# Altium PCB Spot Welder Layout.PcbDoc (part 2 of 2)
Units mm, origin at the board's own origin, x right, y up, seen from the top; angles counter-clockwise.
Board outline 154.58 x 106.48 mm, 2 copper layers (Top Layer, Bottom Layer); 118 components, 61 nets, 368 pads, 104 vias.
Unrouted connection lines stored in the file: 1.
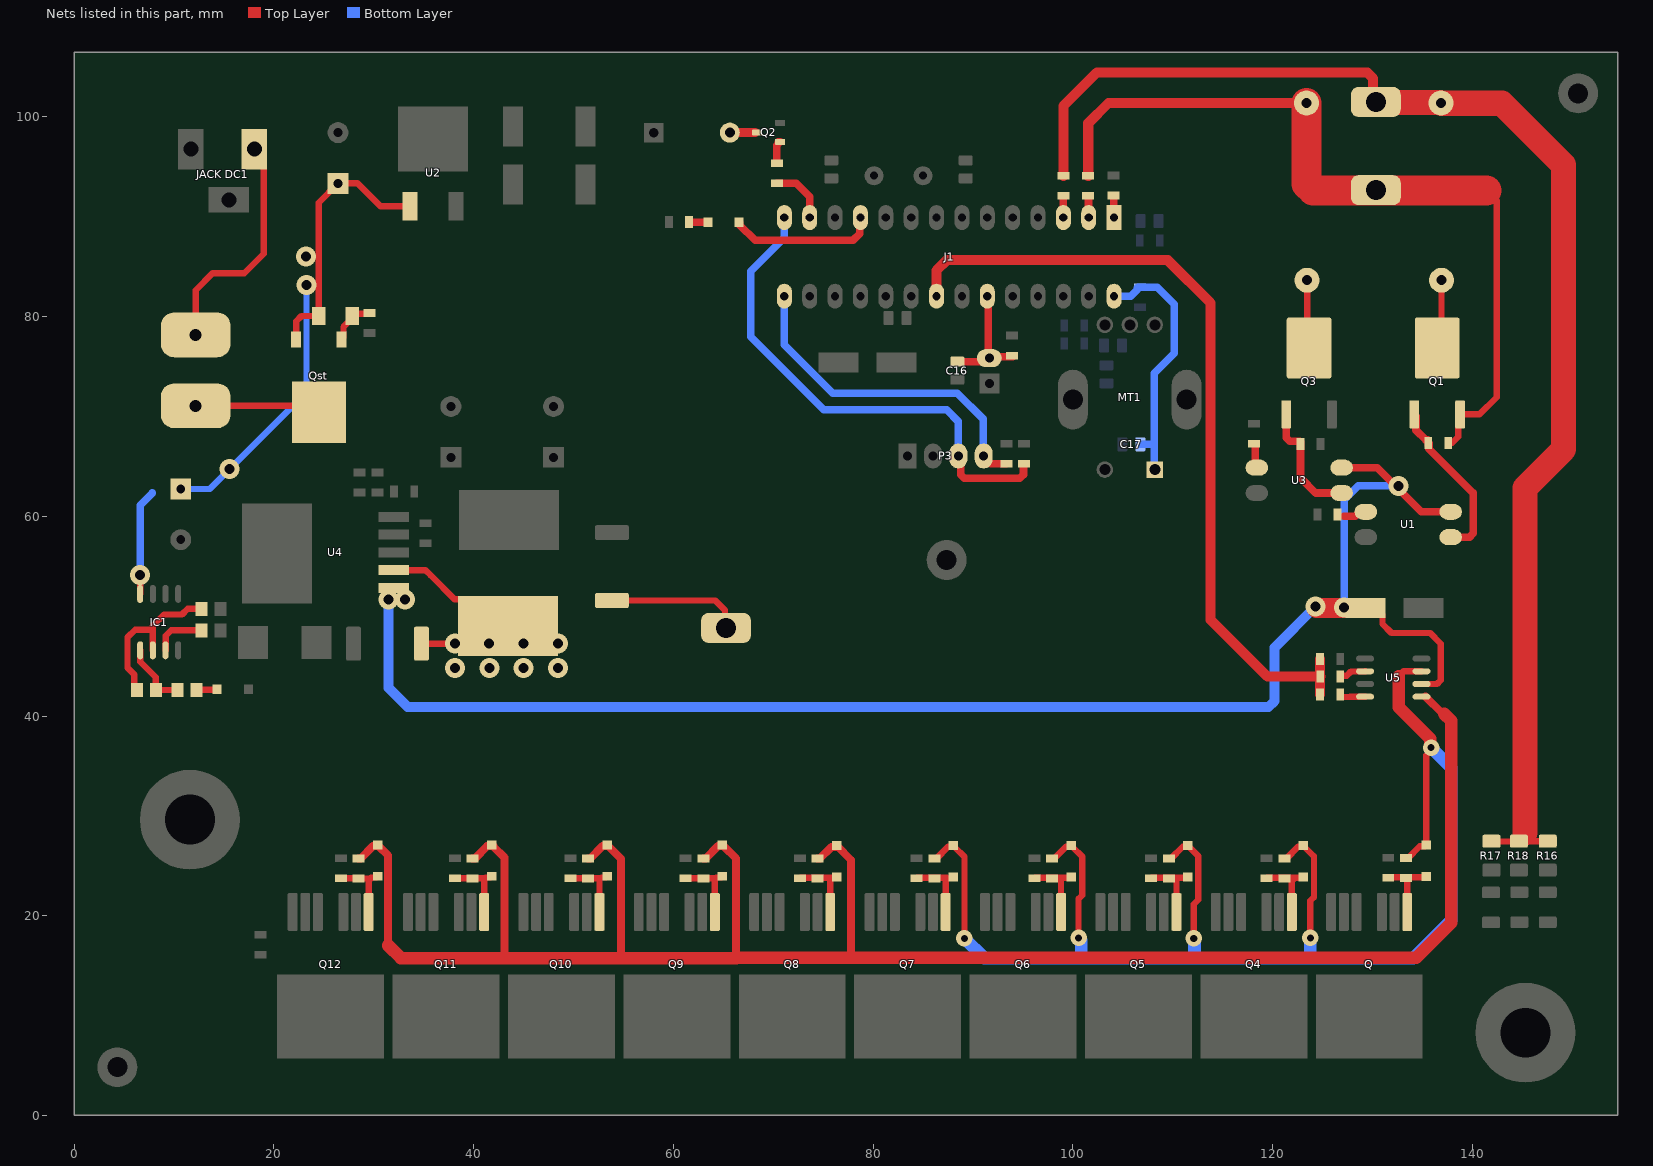
[diagram p2: the nets of this part, all layers, seen from the top]

## Via types
v1: diameter 2, hole 1, Top Layer to Bottom Layer, 76 vias
v2: diameter 3, hole 2, Top Layer to Bottom Layer, 23 vias
v3: diameter 1.651, hole 0.711, Top Layer to Bottom Layer, 5 vias

## Nets (pads, with @x,y where several pads share a name; then routed paths per layer and width w, separated by ;. In a path a pad name is that pad's centre, name@x,y a point inside that pad or via, vN(x,y) a via of type N, cw(c..) or ccw(c..) an arc to the next point about the centre after c; other vN are vias at no path point) (continued)
NetC16_1: C16.1 J1.23 P1.2 R9.1 | length 11.8
  Top Layer w0.762: C16.1@88.443,75.489 90.622,75.489 90.978,75.844 P1.2@91.643,75.844 91.542,75.946 91.542,81.94 J1.23@91.44,82.042 ; P1.2@91.834,75.984 93.612,75.984 R9.1@93.967,75.984
NetD3_K: D3.K L1.1 U4.2 | length 29.1
  Top Layer w0.635: U4.2@32.004,54.61 35.179,54.61 35.687,54.102 38.085,51.705 40.751,51.705 L1.1@43.434,49.022 ; D3.K@34.769,47.244 v1(38.117,47.244) ; L1.1@41.487,47.244 v1(38.117,47.244) ; v1(41.554,47.244) L1.1@41.656,47.244 ; v1(38.117,47.244) L1.1@41.656,47.244 ; L1.1@41.656,47.244 L1.1@43.434,49.022 ; L1.1@41.656,47.244 L1.1@43.434,49.022
  other v1: 38.134,44.806 41.571,44.806 45.009,44.806 48.446,44.806 44.992,47.244 48.429,47.244
NetD4_1: D4.1 J1.11 | length 14.9
  Top Layer w0.762: D4.1@66.599,89.459 66.668,89.39 66.668,89.152 68.19,87.63 77.994,87.63 78.684,88.319 78.684,89.86 J1.11@78.74,89.916
NetD4_2: D4.2 RON1.2 | length 1.9
  Top Layer w0.762: RON1.2@61.57,89.459 D4.2@63.449,89.459
NetD5_1: D5.1 Q.1 R25.2 R26.1 | length 7.5
  Top Layer w0.635: R26.1@131.597,23.8 131.661,23.863 R25.2@133.807,23.863 ; Q.1@133.502,20.37 133.502,23.558 R25.2@133.807,23.863 ; D5.1@135.407,23.927 135.344,23.863 R25.2@133.807,23.863
NetD5_2: D5.2 D7.2 D8.2 D9.2 D10.2 R25.1 R30.1 R33.1 R35.1 R38.1 U5.7 | length 148.3
  Top Layer w0.635: R38.1@86.131,25.73 86.35,25.73 87.514,26.893 87.904,26.893 D10.2@88.036,27.026 88.061,27.026 88.194,26.893 88.194,26.868 89.154,25.908 v3(89.154,17.729) ; R35.1@97.942,25.73 98.161,25.73 99.325,26.893 99.715,26.893 D9.2@99.847,27.026 99.872,27.026 100.005,26.893 100.005,26.868 100.94,25.934 100.94,22.047 100.584,21.692 v3(100.584,17.78) ; R33.1@109.626,25.73 109.845,25.73 111.009,26.893 111.399,26.893 D8.2@111.531,27.026 111.556,27.026 111.689,26.893 111.689,26.868 112.573,25.985 112.573,21.59 112.116,21.133 v3(112.116,17.729) ; R30.1@121.183,25.73 121.402,25.73 122.566,26.893 122.956,26.893 D7.2@123.088,27.026 123.113,27.026 123.246,26.893 123.246,26.868 124.155,25.959 124.155,21.844 123.8,21.488 v3(123.8,17.78) ; 132.639,43.993 133.121,44.475 U5.7@134.93,44.475 ; R25.1@133.375,25.781 133.594,25.781 134.758,26.944 135.275,26.944 D5.2@135.407,27.077 135.407,36.072 135.89,36.555 v3(135.89,36.83)
  Top Layer w1.27: 132.639,43.993 132.639,40.894 135.817,37.716 135.817,36.903 v3(135.89,36.83)
  Bottom Layer w1.27: v3(89.154,17.729) 91.135,15.748 100.838,15.748 ; v3(100.584,17.78) 100.838,17.526 100.838,15.748 ; v3(112.116,17.729) 112.188,17.656 112.188,16.082 112.522,15.748 ; v3(123.8,17.78) 123.8,15.748 ; v3(135.89,36.83) 137.922,34.798 137.922,19.558 134.112,15.748 123.8,15.748 ; 100.838,15.748 112.522,15.748 ; 112.522,15.748 123.8,15.748
NetD6_1: D6.1 R24.2 | length 2.1
  Top Layer w0.635: R24.2@12.257,42.611 12.288,42.642 14.27,42.642 D6.1@14.3,42.672
NetD7_1: D7.1 Q4.1 R27.1 R30.2 | length 7.3
  Top Layer w0.635: R27.1@119.405,23.749 119.469,23.812 122.276,23.812 ; Q4.1@121.945,20.37 121.945,23.482 122.276,23.812 ; D7.1@123.088,23.876 123.025,23.812 122.276,23.812
NetD8_1: D8.1 Q5.1 R22.1 R33.2 | length 7.2
  Top Layer w0.635: R22.1@107.848,23.749 107.912,23.812 110.388,23.812 ; Q5.1@110.388,20.37 110.388,23.812 ; D8.1@111.531,23.876 111.468,23.812 110.388,23.812
NetD9_1: D9.1 Q6.1 R23.1 R35.2 | length 7.2
  Top Layer w0.635: R23.1@96.164,23.749 96.228,23.812 98.908,23.812 ; Q6.1@98.831,20.37 98.831,23.736 98.908,23.812 ; D9.1@99.847,23.876 99.784,23.812 98.908,23.812
NetD10_1: D10.1 Q7.1 R28.1 R38.2 | length 6.5
  Top Layer w0.635: R28.1@84.353,23.749 84.417,23.812 87.376,23.812 87.274,23.711 Q7.1@87.274,20.37
NetD11_1: D11.1 Q8.1 R41.2 R42.1 | length 7.3
  Top Layer w0.635: R42.1@72.669,23.749 72.733,23.812 75.54,23.812 ; Q8.1@75.717,20.37 75.717,23.635 75.54,23.812 ; D11.1@76.352,23.876 76.289,23.812 75.54,23.812
NetD11_2: D11.2 D12.2 D13.2 D14.2 D15.2 R41.1 R45.1 R46.1 R47.1 R48.1 U5.5 | length 202.7
  Top Layer w0.8: R48.1@28.473,25.73 28.692,25.73 29.932,26.969 30.246,26.969 D15.2@30.378,27.102 30.403,27.102 30.536,26.969 30.536,26.944 31.445,26.035 31.445,17.018 ; R47.1@39.903,25.73 40.122,25.73 41.362,26.969 41.676,26.969 D14.2@41.808,27.102 41.833,27.102 41.966,26.969 41.966,26.944 43.078,25.832 43.078,15.748 ; R46.1@51.46,25.73 51.679,25.73 52.919,26.969 53.233,26.969 D13.2@53.365,27.102 53.39,27.102 53.523,26.969 53.523,26.944 54.762,25.705 54.762,15.748 ; R45.1@63.017,25.73 63.236,25.73 64.476,26.969 64.79,26.969 D12.2@64.922,27.102 64.947,27.102 65.08,26.969 65.08,26.944 66.294,25.73 66.294,15.799 66.294,15.748 ; R41.1@74.447,25.73 74.666,25.73 75.83,26.893 76.22,26.893 D11.2@76.352,27.026 76.377,27.026 76.51,26.893 76.51,26.868 77.775,25.604 77.775,15.799 ; U5.5@135.33,41.935 137.046,40.22 137.211,40.22
  Top Layer w1.27: 31.445,17.018 32.715,15.748 43.078,15.748 54.762,15.748 66.294,15.748 ; 66.294,15.799 77.775,15.799 134.417,15.799 137.922,19.304 137.922,39.509 137.211,40.22
NetD12_1: D12.1 Q9.1 R43.1 R45.2 | length 7.2
  Top Layer w0.635: R43.1@61.239,23.749 64.211,23.749 ; Q9.1@64.16,20.37 64.16,23.698 64.211,23.749 ; D12.1@64.922,23.952 64.79,23.819 64.282,23.819 64.211,23.749
NetD13_1: D13.1 Q10.1 R39.1 R46.2 | length 7.2
  Top Layer w0.635: R39.1@49.682,23.749 52.73,23.749 ; Q10.1@52.603,20.37 52.603,23.622 52.73,23.749 ; D13.1@53.365,23.952 53.233,23.819 52.801,23.819 52.73,23.749
NetD14_1: D14.1 Q11.1 R40.1 R47.2 | length 7.2
  Top Layer w0.635: R40.1@38.125,23.749 41.148,23.749 ; Q11.1@41.046,20.37 41.046,23.647 41.148,23.749 ; D14.1@41.808,23.952 41.676,23.819 41.218,23.819 41.148,23.749
NetD15_1: D15.1 Q12.1 R44.1 R48.2 | length 7.2
  Top Layer w0.635: R44.1@26.695,23.749 26.708,23.736 28.461,23.736 R48.2@28.473,23.724 29.667,23.724 ; Q12.1@29.489,20.37 29.489,23.546 29.667,23.724 ; D15.1@30.378,23.952 30.246,23.819 29.763,23.819 29.667,23.724
NetDST_1: DST.1 Qst.1 RST.1 | length 4.8
  Top Layer w0.635: Qst.1@26.785,77.724 26.968,77.907 26.968,78.966 27.837,79.836 DST.1@27.837,80.061 28.078,80.302 29.502,80.302 RST.1@29.566,80.366 RST.1@29.785,80.366
NetIC1_1: IC1.1 R24.1 R31.2 | length 6.8
  Top Layer w0.635: IC1.1@6.604,46.578 6.622,46.56 6.622,45.448 8.178,43.892 8.178,42.626 R31.2@8.193,42.611 R24.1@10.357,42.611
NetIC1_2: IC1.2 R29.2 R31.1 | length 16.6
  Top Layer w0.635: R31.1@6.293,42.611 6.011,42.894 6.011,44.154 5.334,44.831 5.334,47.879 6.096,48.641 7.874,48.641 ; IC1.2@7.874,46.578 7.874,48.641 ; R29.2@12.762,50.734 11.364,50.734 10.795,50.165 9.017,50.165 7.874,49.022 7.874,48.641
NetIC1_3: IC1.3 R21.2 | length 5.3
  Top Layer w0.635: IC1.3@9.144,46.578 9.162,46.595 9.162,48.024 9.713,48.575 R21.2@12.762,48.575
NetJ1_1: J1.1 R11.1 | length 2.2
  Top Layer w0.635: R11.1@104.089,92.126 R11.1@104.115,92.1 ; J1.1@104.115,89.941 J1.1@104.14,89.916
  Top Layer w0.762: J1.1@104.115,89.941 R11.1@104.115,92.1
NetJ1_2: J1.2 R14.2 | length 2.2
  Top Layer w0.635: R14.2@101.549,92.1 R14.2@101.575,92.075 ; J1.2@101.575,89.941 J1.2@101.6,89.916
  Top Layer w0.762: J1.2@101.575,89.941 R14.2@101.575,92.075
NetJ1_3: J1.3 R15.2 | length 2.2
  Top Layer w0.762: J1.3@99.06,89.916 R15.2@99.06,92.075
"NetJACK DC1_1": "JACK DC1.1" SWst.2 | length 23.7
  Top Layer w0.635: SWst.2@12.167,78.169 12.167,82.652 13.843,84.328 17.018,84.328 18.986,86.296 18.986,95.822 18.034,96.774
NetLS1_2: LS1.2 Q2.3 | length 2.7
  Top Layer w0.635: Q2.3@68.205,98.425 68.23,98.45 Q2.3@68.395,98.45
  Top Layer w0.889: LS1.2@65.659,98.425 Q2.3@68.205,98.425
NetQ1_1: Q1.1 R3.2 U1.3 | length 17.1
  Top Layer w0.762: Q1.1@134.21,70.206 134.377,70.038 134.377,68.62 135.353,67.643 135.547,67.643 135.611,67.58 R3.2@135.611,67.142 ; R3.2@135.611,67.361 135.674,67.297 135.674,66.764 140.106,62.332 140.106,58.284 139.734,57.912 U1.3@137.854,57.912
NetQ1_4: Q1.4 R1.1 | length 7
  Top Layer w0.635: Q1.4@136.5,76.856 136.931,77.288 R1.1@136.931,83.642
NetQ2_1: Q2.1 R4.2 | length 2.4
  Top Layer w0.762: R4.2@70.358,95.377 70.358,97.163 70.513,97.318 70.513,97.483 70.53,97.5 Q2.1@70.695,97.5
NetQ3_1: Q3.1 R8.2 U3.3 | length 12.3
  Top Layer w0.762: Q3.1@121.383,70.206 121.383,67.888 121.755,67.516 122.745,67.516 122.809,67.453 R8.2@122.809,67.234 122.809,63.881 124.358,62.332 U3.3@126.932,62.332
NetQ3_4: Q3.4 R5.1 | length 6.9
  Top Layer w0.635: R5.1@123.469,83.642 123.469,77.059 Q3.4@123.673,76.856
NetQst_3: Qst.3 SWst.1 | length 12.6
  Top Layer w0.635: SWst.1@12.167,71.069 23.86,71.069 Qst.3@24.505,70.424
NetR2_1: R2.1 U1.1 | length 2.4
  Top Layer w0.762: 127.152,59.995 128.311,59.995 128.768,60.452 U1.1@129.354,60.452
NetR6_1: R6.1 U3.1 | length 2.5
  Top Layer w0.762: R6.1@118.161,67.259 118.233,67.259 118.296,67.196 118.296,65.007 U3.1@118.432,64.872
NetR32_2: R32.2 U5.2 | length 2.7
  Top Layer w0.635: R32.2@126.797,43.942 126.797,43.98 126.86,44.044 127.457,44.044 127.871,44.458 129.263,44.458 U5.2@129.28,44.475
NetR34_2: R34.2 U5.4 | length 2.7
  Top Layer w0.635: R34.2@126.771,42.164 126.771,41.974 126.835,41.91 127.762,41.91 127.77,41.918 129.263,41.918 U5.4@129.28,41.935
Pulse: J1.21 R32.1 R34.1 R36.2 | length 80.9
  Top Layer w1: J1.21@86.36,82.042 86.36,84.633 87.376,85.649 109.525,85.649 113.792,81.382 113.792,49.632 119.482,43.942 R32.1@124.79,43.942 ; R34.1@124.765,42.164 124.765,43.586 124.765,43.942 R36.2@124.765,45.72
SCL: J1.14 P3.3 Rscl.2 | length 50.8
  Top Layer w0.762: P3.3@88.544,66.04 88.767,65.817 88.767,64.177 89.139,63.805 94.691,63.805 95.063,64.177 95.063,65.218 Rscl.2@95.123,65.278
  Bottom Layer w0.762: J1.14@71.12,89.916 71.12,87.884 67.767,84.531 67.767,77.978 75.082,70.663 87.376,70.663 88.544,69.494 P3.3@88.544,66.04
SDA: J1.15 P3.4 Rsda.1 | length 34.2
  Top Layer w0.635: P3.4@91.084,66.04 91.084,66.005 P3.4@91.812,65.278
  Top Layer w0.762: P3.4@91.812,65.278 Rsda.1@93.345,65.278
  Bottom Layer w0.762: J1.15@71.12,82.042 71.12,77.165 75.946,72.339 88.443,72.339 91.038,69.744 P3.4@91.038,66.04
SPK: J1.13 R4.1 | length 6
  Top Layer w0.762: R4.1@70.358,93.37 72.288,93.37 73.66,91.999 J1.13@73.66,89.916
SW: C17.2 J1.28 MT1.1 RMT13.2 | length 26.1
  Bottom Layer w0.762: J1.28@104.14,82.042 105.816,82.042 106.448,82.674 106.448,82.893 106.512,82.956 RMT13.2@106.731,82.956 108.458,82.956 110.185,81.229 110.185,76.352 108.153,74.32 108.153,67.31 ; C17.2@106.767,67.208 108.052,67.208 108.153,67.31 ; MT1.1@108.215,64.679 108.153,64.74 108.153,67.31
VC0: pad.2@130.353,92.659 Q1.3 R3.1 R5.2 R14.1 | length 83.5
  Top Layer w0.635: R3.1@137.617,67.361 138.024,67.361 138.622,67.959 138.622,70.038 Q1.3@138.79,70.206 140.742,70.206 142.469,71.933 142.469,91.618 141.453,92.634
  Top Layer w1.016: R14.1@101.549,94.107 101.549,99.365 103.581,101.397 R5.2@123.419,101.397
  Top Layer w3: R5.2@123.419,101.397 123.419,93.269 124.054,92.634 141.453,92.634
VC1: D2.K pad.2@65.278,48.819 pad.2@130.353,101.498 R1.2 R15.1 R16.1 R17.1 R18.1 | length 157.3
  Top Layer w0.635: D2.K@53.848,51.566 64.208,51.566 65.176,50.597 pad.2@65.176,49.378 ; R17.1@141.935,27.46 141.963,27.432 144.651,27.432 R18.1@144.678,27.46 R16.1@147.574,27.46
  Top Layer w1.016: R15.1@99.06,94.107 99.06,101.092 102.413,104.445 129.489,104.445 130.084,103.85 130.084,101.767 pad.2@130.353,101.498 ; pad.2@129.02,102.472 pad.2@130.095,101.397 ; pad.2@131.775,101.397 R1.2@136.881,101.397
  Top Layer w2: pad.2@130.353,101.498 pad.2@130.404,101.448 ; R1.2@136.83,101.448 R1.2@136.925,101.353
  Top Layer w2.54: pad.2@130.404,101.448 R1.2@136.83,101.448 ; R1.2@136.925,101.353 142.995,101.353 149.149,95.199 149.149,66.7 145.288,62.84 145.288,28.296
VCC: C3.1 C4.1 C14.1 DST.2 IC1.8 Qst.2 U1.4 U2.1 U3.4 U4.1 U5.6 | length 226.4
  Top Layer w0.635: IC1.8@6.604,52.228 v1(6.604,54.102) ; Qst.2@22.225,77.724 22.225,79.527 22.758,80.061 DST.2@24.487,80.061 24.487,91.416 C4.1@26.416,93.345 28.372,93.345 30.677,91.04 U2.1@33.651,91.04 ; U4.1@32.004,52.832 32.964,52.832 33.147,52.649 v1(33.147,51.689) ; C14.1@129.332,50.825 130.332,50.825 131.015,50.143 131.015,49.223 131.928,48.311 135.788,48.311 136.855,47.244 136.855,43.577 136.483,43.205 U5.6@134.93,43.205
  Top Layer w0.7: v1(124.308,50.952) v1@124.435,50.825
  Top Layer w0.762: U3.4@126.932,64.872 130.505,64.872 134.925,60.452 U1.4@137.854,60.452
  Top Layer w2: v1@124.435,50.825 C14.1@129.332,50.825
  Bottom Layer w0.635: C3.1@10.668,62.738 13.567,62.738 v1(15.566,64.737) 23.266,72.438 v1(23.266,83.16)
  Bottom Layer w0.762: v1(6.604,54.102) 6.604,61.112 7.823,62.332 ; v1(127.181,50.87) 127.181,61.649 128.575,63.043 v1(132.639,63.043)
  Bottom Layer w1: v1(31.496,51.689) 31.496,42.799 33.401,40.894 119.607,40.894 120.193,41.48 120.193,46.838 v1(124.308,50.952)
  other v1: 23.216,86.004
pads on no net: C6.0 C7.0 C8.0 C11.0 C12.0 C13.0 C15.0 C16.0 C17.0 C18.0 C19.0 IC1.5 IC1.6 IC1.7 J1.4 J1.5 J1.6 J1.7 J1.12 J1.16 J1.17 J1.18 Q2.0 R16.0 R17.0 R18.0 U5.1 U5.8

## Other copper
Top Layer:
  rectangle net LOAD-: 20.371,1.575 149.962,14.173
  region net NetD11_2: 134.112,42.418 135.89,42.418 138.43,39.878 137.668,39.116 137.414,39.116 134.874,41.656 134.112,41.656 cw(c134.239,42.037)
  region net +5: 82.55,70.155 82.55,64.973 83.769,64.973 84.379,65.583 84.379,69.088
  region net NetD11_2: 31.14,19.304 31.039,18.999 30.785,16.815 31.242,16.358 31.394,16.51 31.801,16.51
  region net VC1: 141.021,27.28 141.021,30.175 144.475,33.63 146.304,33.63 148.488,31.445 148.488,27.026 148.387,26.924 148.336,26.975 141.173,26.975
  region net NetD5_2: 132.029,44.145 132.08,44.196 132.08,44.552 132.334,44.806 135.484,44.806 135.636,44.653 135.534,44.552 135.534,44.247 133.807,44.247 133.045,43.485 132.994,43.485
  region net GND: 129.54,58.166 133.35,58.166 137.16,54.356 137.16,51.054 133.858,51.054 132.334,52.578 132.334,52.832 130.81,52.832 130.048,53.594
  region net GND: 117.348,62.738 117.094,62.484 117.094,54.102 118.618,52.578 129.032,52.578 130.302,53.848 130.302,58.166 130.048,58.166 129.54,58.674 128.778,57.912 121.666,57.912 119.38,60.198 119.38,62.484 119.126,62.738
  region net LOAD-: 134.937,13.626 140.939,19.629 140.939,19.731 141.122,19.914 141.173,19.863 148.844,19.863 150.774,17.932 150.774,2.286 150.063,1.575 146.558,1.575
  region net BATT-: 21.895,17.729 8.738,17.729 6.35,20.117 6.35,36.271 8.687,38.608 22.504,38.608
  region net LOAD-: 20.396,1.6 18.034,3.962 18.034,16.256 19.253,16.256 21.569,13.94
  region net VC1: 52.375,52.273 52.426,52.222 66.396,52.222 67.767,50.851 67.767,47.549 67.31,47.092 54.102,47.092 52.426,48.768
  region net NetQ3_4: 121.463,85.446 121.463,85.954 122.123,86.614 125.222,86.614 125.882,85.954 125.882,85.446
  region net NetQ1_4: 138.735,79.451 138.735,84.734 137.617,85.852 135.331,85.852 134.264,84.785 134.264,79.299
  region net NetQ3_4: 121.463,79.553 121.463,85.446 125.882,85.446 125.882,79.604
  region net VC0: 137.516,66.853 143.459,66.853 145.745,69.139 145.745,94.945 143.815,96.876 141.224,96.876 139.954,95.606 139.954,83.312 142.697,80.569 142.697,72.136 140.767,70.206 138.79,70.206 138.79,68.127
  region net BATT-: 125.578,71.628 131.166,71.628 132.08,70.714 132.08,68.326 130.454,66.7 125.12,66.7 125.12,68.631 125.425,68.936 125.425,71.526 125.476,71.577
  region net BATT-: 132.944,38.608 133.96,37.592 133.96,29.769 132.944,28.753 131.623,30.074 130.404,30.074
  region net BATT-: 22.454,38.557 22.504,38.608 132.944,38.608 132.944,28.753 22.606,28.753 22.25,29.108
  region net BATT-: 124.866,37.033 126.441,38.608 132.944,38.608 132.944,35.255 128.88,31.191 128.88,23.34 129.969,22.25 132.537,22.25 132.69,22.098 132.69,18.491 131.978,17.78 125.882,17.78 124.866,18.796
  region net BATT-: 113.284,37.033 114.859,38.608 121.361,38.608 121.361,35.255 117.297,31.191 117.297,23.34 118.387,22.25 120.955,22.25 121.107,22.098 121.107,18.491 120.396,17.78 114.3,17.78 113.284,18.796
  region net BATT-: 101.752,37.033 103.327,38.608 109.83,38.608 109.83,35.255 105.766,31.191 105.766,23.34 106.855,22.25 109.423,22.25 109.576,22.098 109.576,18.491 108.864,17.78 102.768,17.78 101.752,18.796
  region net BATT-: 90.17,37.033 91.745,38.608 98.247,38.608 98.247,35.255 94.183,31.191 94.183,23.34 95.273,22.25 97.841,22.25 97.993,22.098 97.993,18.491 97.282,17.78 91.186,17.78 90.17,18.796
  region net BATT-: 78.638,37.033 80.213,38.608 86.716,38.608 86.716,35.255 82.652,31.191 82.652,23.34 83.741,22.25 86.309,22.25 86.462,22.098 86.462,18.491 85.75,17.78 79.654,17.78 78.638,18.796
  region net BATT-: 67.056,37.033 68.631,38.608 75.133,38.608 75.133,35.255 71.069,31.191 71.069,23.34 72.159,22.25 74.727,22.25 74.879,22.098 74.879,18.491 74.168,17.78 68.072,17.78 67.056,18.796
  region net BATT-: 55.524,37.033 57.099,38.608 63.602,38.608 63.602,35.255 59.538,31.191 59.538,23.34 60.627,22.25 63.195,22.25 63.348,22.098 63.348,18.491 62.636,17.78 56.54,17.78 55.524,18.796
  region net BATT-: 43.942,37.033 45.517,38.608 52.019,38.608 52.019,35.255 47.955,31.191 47.955,23.34 49.045,22.25 51.613,22.25 51.765,22.098 51.765,18.491 51.054,17.78 44.958,17.78 43.942,18.796
  region net BATT-: 32.41,37.033 33.985,38.608 40.488,38.608 40.488,35.255 36.424,31.191 36.424,23.34 37.513,22.25 40.081,22.25 40.234,22.098 40.234,18.491 39.522,17.78 33.426,17.78 32.41,18.796
  region net BATT-: 20.879,36.982 22.454,38.557 28.956,38.557 28.956,35.204 24.892,31.14 24.892,23.289 25.982,22.2 28.55,22.2 28.702,22.047 28.702,18.44 27.991,17.729 21.895,17.729 20.879,18.745
  region net "NetJACK DC1_1": 8.788,77.267 8.738,77.318 8.738,79.654 18.44,89.357 18.44,98.552 18.68,98.792 20.436,98.792 20.436,85.764 15.494,80.823 15.494,77.47
  region net VCC: 27.33,94.336 29.108,94.336 30.988,92.456 33.02,92.456 33.02,89.713 32.918,89.611 30.023,89.611 28.397,91.237 26.111,91.237 25.552,91.796
  region net GND: 36.509,104.089 91.237,104.089 94.437,100.889 94.437,93.777 93.472,92.812 91.288,92.812 91.288,94.691 90.068,95.91 88.748,95.91 87.935,96.723 77.064,96.723 76.403,96.063 74.371,96.063 69.28,101.154 73.914,100.889 38.049,100.889 37.897,100.736
  region net +5: 81.636,76.098 83.21,77.673 83.21,82.956 83.363,83.109 83.414,83.058 84.277,83.058 84.277,81.432 84.48,81.229 84.379,81.128 84.379,75.59
  region net +5: 80.366,76.352 80.366,74.422 79.756,73.812 79.756,72.441 82.956,69.24 82.956,68.631 83.922,68.631 84.379,69.088 84.379,71.222 84.988,71.831 84.988,75.743 84.379,76.352
  region net +5: 37.49,92.405 40.081,92.405 42.875,95.199 52.426,95.199 53.442,94.183 53.442,91.643 52.629,90.83 43.84,90.83 42.672,89.662 37.948,89.662
  region net GND: 16.815,51.054 11.43,56.439 11.43,57.709 18.694,57.709 19.152,57.252
  region net NetD3_K: 47.879,52.07 49.479,52.07 50.14,51.41 50.14,43.891 49.632,43.383 35.509,43.383 33.884,45.009 33.884,45.822 36.627,45.822 38.71,47.904
  region net NetC9_1: 48.514,62.636 45.923,65.227 44.856,65.227 43.688,64.059 43.79,63.957 43.79,61.773
  region net NetC9_1: 36.373,67.005 36.627,67.259 53.645,67.259 53.848,67.056 50.648,63.856 48.006,63.856 46.431,65.43 39.776,65.43 39.472,65.735
  region net NetC9_1: 38.557,62.636 38.557,62.027 39.065,61.519 39.116,61.57 47.549,61.57 48.209,62.23 46.584,63.856 39.929,63.856
  region net NetC9_1: 46.584,63.856 45.212,65.227 40.437,65.227 38.659,67.005 36.373,67.005 35.763,66.396 35.763,64.516 38.964,61.316
  region net NetC9_1: 48.26,67.056 53.848,67.056 55.524,65.38 55.524,58.471 52.73,58.471 52.172,59.03 52.172,63.043 51.359,63.856 48.41,63.856
  region net GND: 21.641,101.143 25.4,97.384 32.868,97.384 32.868,99.466 35.204,101.803
  region net GND: 5.791,90.526 5.944,90.373 17.526,90.373 17.526,92.913 17.475,92.964 17.424,92.913 13.208,92.913 12.802,93.32 12.802,99.466 10.993,101.275
  region net GND: 5.186,55.86 2.235,58.811 2.235,102.159 4.166,104.089 37.033,104.089 40.132,100.99 51.816,100.99 52.121,100.686 52.121,97.384 36.119,97.384 32.918,100.584 14.478,100.584 12.395,98.501 12.395,95.098 12.294,95.098 4.978,87.782 4.978,61.57 6.248,60.3
  region net NetD3_K: 35.623,49.721 34.277,49.721 33.884,49.327 33.884,45.822 34.061,45.644 34.341,45.923 35.204,45.923
  region net NetD3_K: 35.623,49.721 37.694,47.65 38.557,47.65 39.624,46.584 39.624,46.228 38.964,45.568 34.239,45.568
  region net VCC: 9.601,61.671 7.417,61.671 6.553,62.535 6.553,65.481 7.061,65.989 16.662,65.989 17.018,65.634 17.018,63.449 15.291,61.722 11.227,61.722
  region net VCC: 27.33,94.336 22.962,94.336 21.438,92.812 21.438,77.267 21.793,76.911 24.384,76.911 25.095,77.622 25.095,89.611 26.721,91.237 27.432,91.237
  region net NetQst_3: 21.793,73.508 9.195,73.508 8.433,72.746 8.433,69.444 10.566,67.31 23.774,67.31 24.079,67.615
  region net GND: 16.815,61.366 21.438,65.989 28.397,65.989 28.956,66.548 28.956,71.679 30.734,73.457 50.952,73.457 52.324,72.085 52.324,69.698 52.07,69.444 33.376,69.444 31.344,67.412 31.344,64.465 30.785,63.906 25.197,63.906 23.673,62.382 23.673,61.265
  region net GND: 6.147,60.401 6.248,60.3 15.748,60.3 16.815,61.366 23.571,61.366 23.774,61.163 18.491,55.88 5.182,55.88 3.912,57.15 3.912,60.401
  region net GND: 16.815,51.054 20.523,51.054 22.2,49.378 22.2,44.856 23.063,43.993 28.092,43.993 28.905,44.806 28.905,49.022 28.397,49.53 22.25,55.677 16.815,55.677
  region net NetC9_1: 38.557,62.027 36.17,64.414 36.17,65.024 39.98,65.024 40.589,64.414
  region net NetD3_K: 33.528,55.118 36.957,55.118 40.005,52.07 47.879,52.07 47.879,50.546 44.729,47.396 38.456,47.396 35.814,50.038 35.814,52.832 34.544,54.102 33.147,54.102
  text "https://github.com/giangvo200837" at 70.099,43.683 h1.52
Bottom Layer:
  rectangle net LOAD-: 20.371,1.575 149.962,14.173
  region net BATT-: 16.51,48.971 11.938,48.971 11.278,48.311 11.278,18.948 12.497,17.729 21.895,17.729 21.895,36.119 23.724,37.948 19.05,42.621 19.05,48.057 18.136,48.971
  region net LOAD-: 132.994,13.005 134.417,13.005 141.275,19.863 148.742,19.863 150.673,17.932 150.673,2.286 149.962,1.575 148.234,3.302 137.871,3.302
  region net BATT-: 12.497,17.729 8.687,17.729 6.35,20.066 6.35,36.424 8.738,38.811 10.82,38.811 11.786,39.776 12.294,39.268 18.44,39.268
  region net LOAD-: 20.371,1.575 18.186,3.759 18.186,16.358 19.253,16.358 23.368,12.243 24.587,12.243
  region net BATT-: 132.944,38.608 132.944,38.557 133.96,37.541 133.96,29.718 133.909,29.718 132.944,28.753 131.216,30.48 129.642,30.48
  region net BATT-: 20.879,36.982 22.454,38.557 28.956,38.557 28.956,35.204 24.892,31.14 24.892,23.289 25.982,22.2 28.55,22.2 28.702,22.047 28.702,18.44 27.991,17.729 21.895,17.729 20.879,18.745
  region net BATT-: 32.41,37.033 33.985,38.608 40.488,38.608 40.488,35.255 36.424,31.191 36.424,23.34 37.513,22.25 40.081,22.25 40.234,22.098 40.234,18.491 39.522,17.78 33.426,17.78 32.41,18.796
  region net BATT-: 43.942,37.033 45.517,38.608 52.019,38.608 52.019,35.255 47.955,31.191 47.955,23.34 49.045,22.25 51.613,22.25 51.765,22.098 51.765,18.491 51.054,17.78 44.958,17.78 43.942,18.796
  region net BATT-: 55.524,37.033 57.099,38.608 63.602,38.608 63.602,35.255 59.538,31.191 59.538,23.34 60.627,22.25 63.195,22.25 63.348,22.098 63.348,18.491 62.636,17.78 56.54,17.78 55.524,18.796
  region net BATT-: 67.056,37.033 68.631,38.608 75.133,38.608 75.133,35.255 71.069,31.191 71.069,23.34 72.159,22.25 74.727,22.25 74.879,22.098 74.879,18.491 74.168,17.78 68.072,17.78 67.056,18.796
  region net BATT-: 78.638,37.033 80.213,38.608 86.716,38.608 86.716,35.255 82.652,31.191 82.652,23.34 83.741,22.25 86.309,22.25 86.462,22.098 86.462,18.491 85.75,17.78 79.654,17.78 78.638,18.796
  region net BATT-: 90.17,37.033 91.745,38.608 98.247,38.608 98.247,35.255 94.183,31.191 94.183,23.34 95.273,22.25 97.841,22.25 97.993,22.098 97.993,18.491 97.282,17.78 91.186,17.78 90.17,18.796
  region net BATT-: 101.752,37.033 103.327,38.608 109.83,38.608 109.83,35.255 105.766,31.191 105.766,23.34 106.855,22.25 109.423,22.25 109.576,22.098 109.576,18.491 108.864,17.78 102.768,17.78 101.752,18.796
  region net BATT-: 113.284,37.033 114.859,38.608 121.361,38.608 121.361,35.255 117.297,31.191 117.297,23.34 118.387,22.25 120.955,22.25 121.107,22.098 121.107,18.491 120.396,17.78 114.3,17.78 113.284,18.796
  region net BATT-: 124.866,37.033 126.441,38.608 132.944,38.608 132.944,35.255 128.88,31.191 128.88,23.34 129.969,22.25 132.537,22.25 132.69,22.098 132.69,18.491 131.978,17.78 125.882,17.78 124.866,18.796
  region net BATT-: 22.454,38.557 22.504,38.608 132.944,38.608 132.944,28.753 22.606,28.753 22.25,29.108
  region net NetD3_K: 58.877,52.07 59.893,51.054 59.893,44.399 58.877,43.383
  region net NetC9_1: 38.557,56.693 38.557,61.722 35.763,64.516 35.763,66.396 36.678,67.31 38.405,67.31 40.488,65.227 45.872,65.227 48.616,62.484 58.979,62.484 59.893,61.57 59.893,56.032 59.233,55.372 39.878,55.372
  region net NetD3_K: 58.877,52.07 58.877,43.383 35.509,43.383 33.884,45.009 33.884,49.327 34.29,49.733 36.017,49.733 38.354,52.07
  region net VCC: 9.652,61.671 15.85,61.671 26.822,50.698 33.934,50.698 34.544,51.308 34.544,52.832 34.493,52.832 33.68,53.645 29.058,53.645 17.932,64.77
  region net VCC: 7.01,65.989 14.681,65.989 20.879,72.187 20.879,84.988 22.657,86.766 24.384,86.766 25.095,86.055 25.044,86.004 25.044,70.612 16.104,61.671 7.417,61.671 6.553,62.535 6.553,65.481
  text "+CAP 2" at 134.849,97.917 h1.52
  text "+CAP 1" at 134.798,88.519 h1.52
  text "+CAP 2 / CHARGE" at 79.096,46.736 h1.52
  text "https://github.com/giangvo200837" at 106.075,43.531 h1.52
  text "-CAP 1" at 16.586,15.367 h1.52
  text "-Kwel" at 17.602,4.953 h1.52

## Silkscreen, mask and mechanical layers (free items; w line width, h text height)
Top Solder:
  text "https://github.com/giangvo200837" at 70.099,43.683 h1.52
Bottom Solder:
  text "+CAP 2" at 134.849,97.917 h1.52
  text "+CAP 1" at 134.798,88.519 h1.52
  text "+CAP 2 / CHARGE" at 79.096,46.736 h1.52
  text "https://github.com/giangvo200837" at 106.075,43.531 h1.52
  text "-CAP 1" at 16.586,15.367 h1.52
  text "-Kwel" at 17.602,4.953 h1.52
Mechanical 1:
  lines w0.254: 0,0 0.006,0.006 0.006,106.474 154.562,106.474 154.575,106.46 154.575,0.017 154.558,0 0,0

## Text inside footprints (layer, text, board x,y; h text height)
LS1: Top Overlay "+" at 59.449,97.701 h1.52